# Altium PCB main1.PcbDoc
Units mm, origin at the board's own origin, x right, y up, seen from the top; angles counter-clockwise.
Board outline 100 x 68 mm, 2 copper layers (Top Layer, Bottom Layer); 32 components, 45 nets, 142 pads, 32 vias.
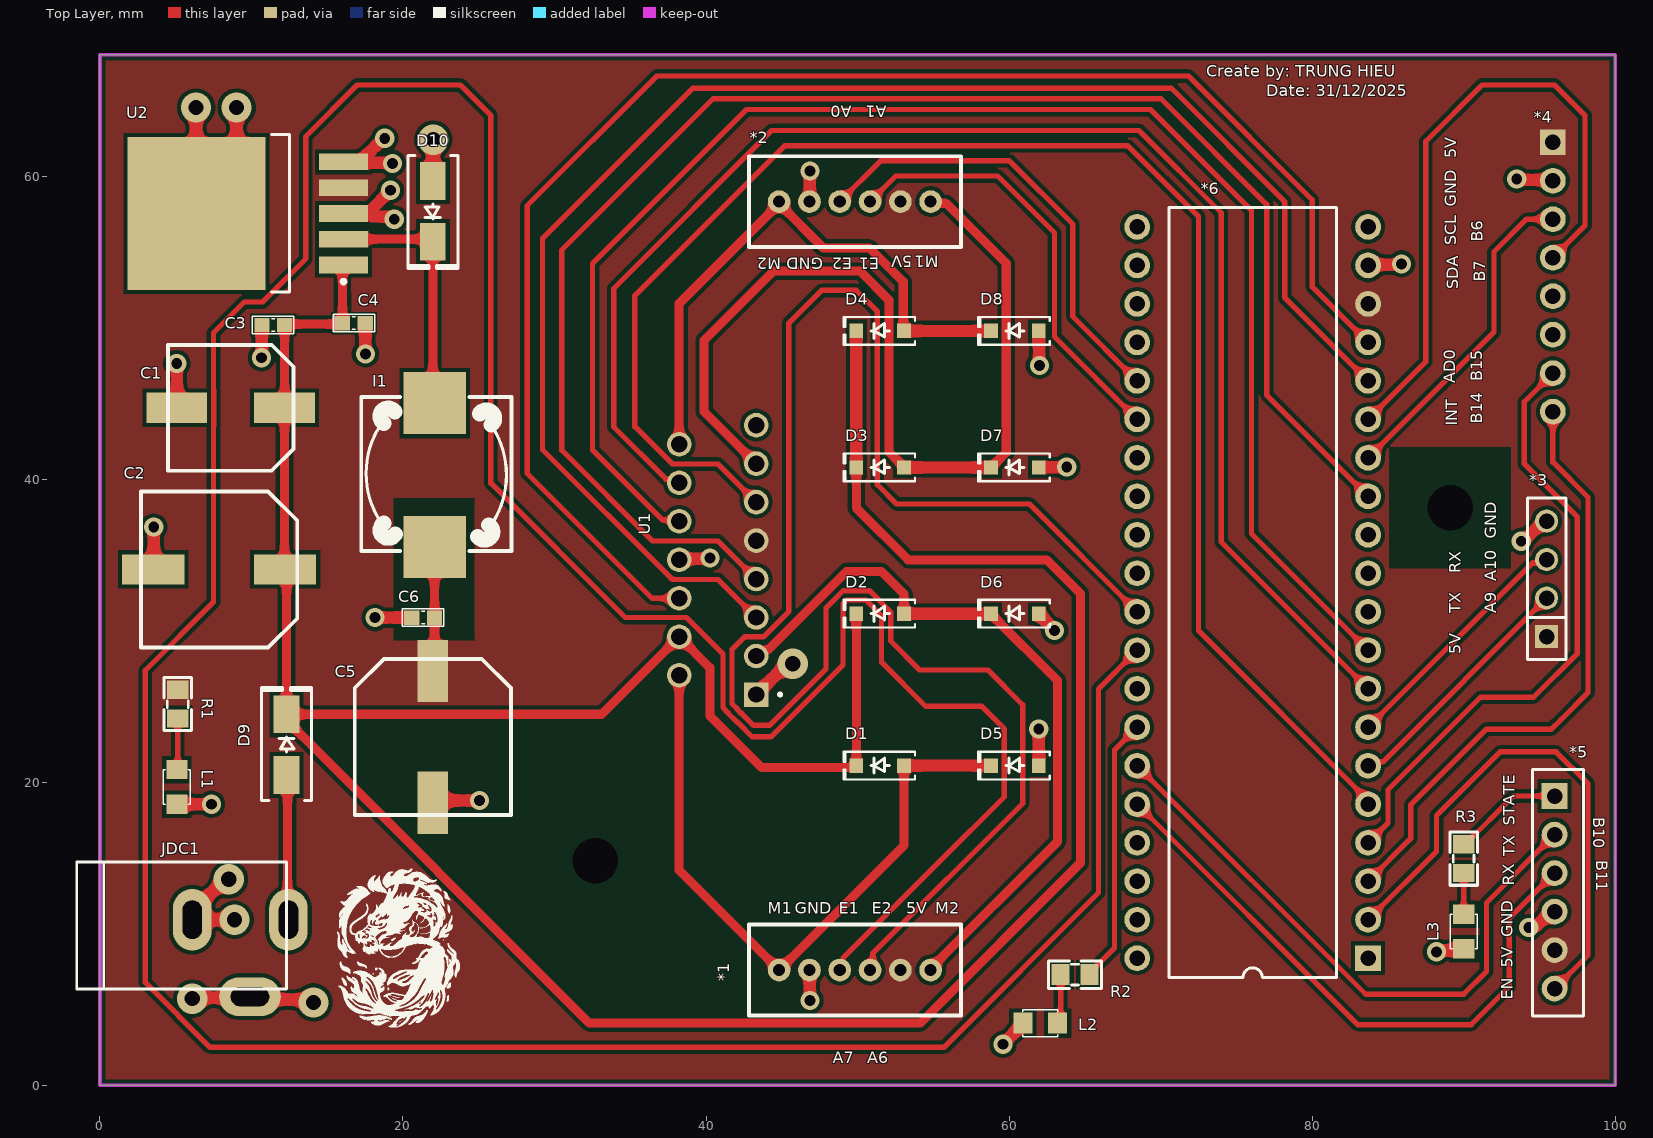
[diagram p0: Top Layer view]
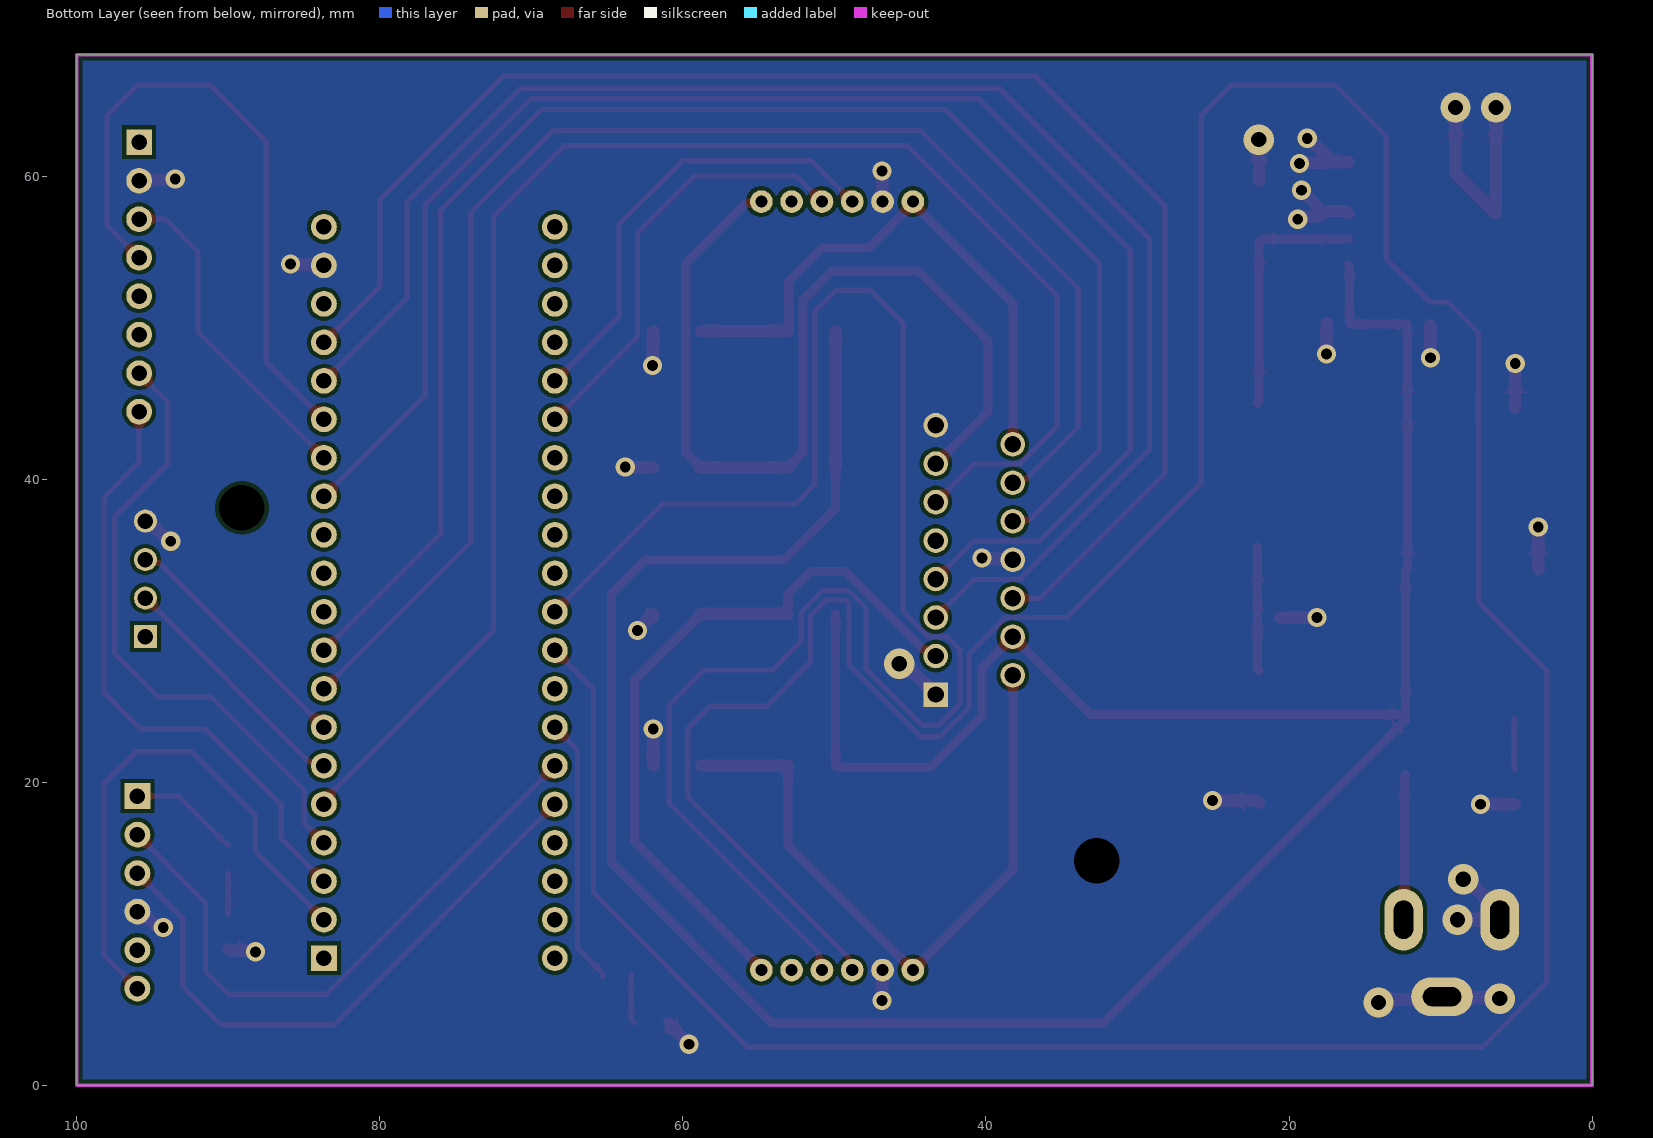
[diagram p1: Bottom Layer view, seen from below]
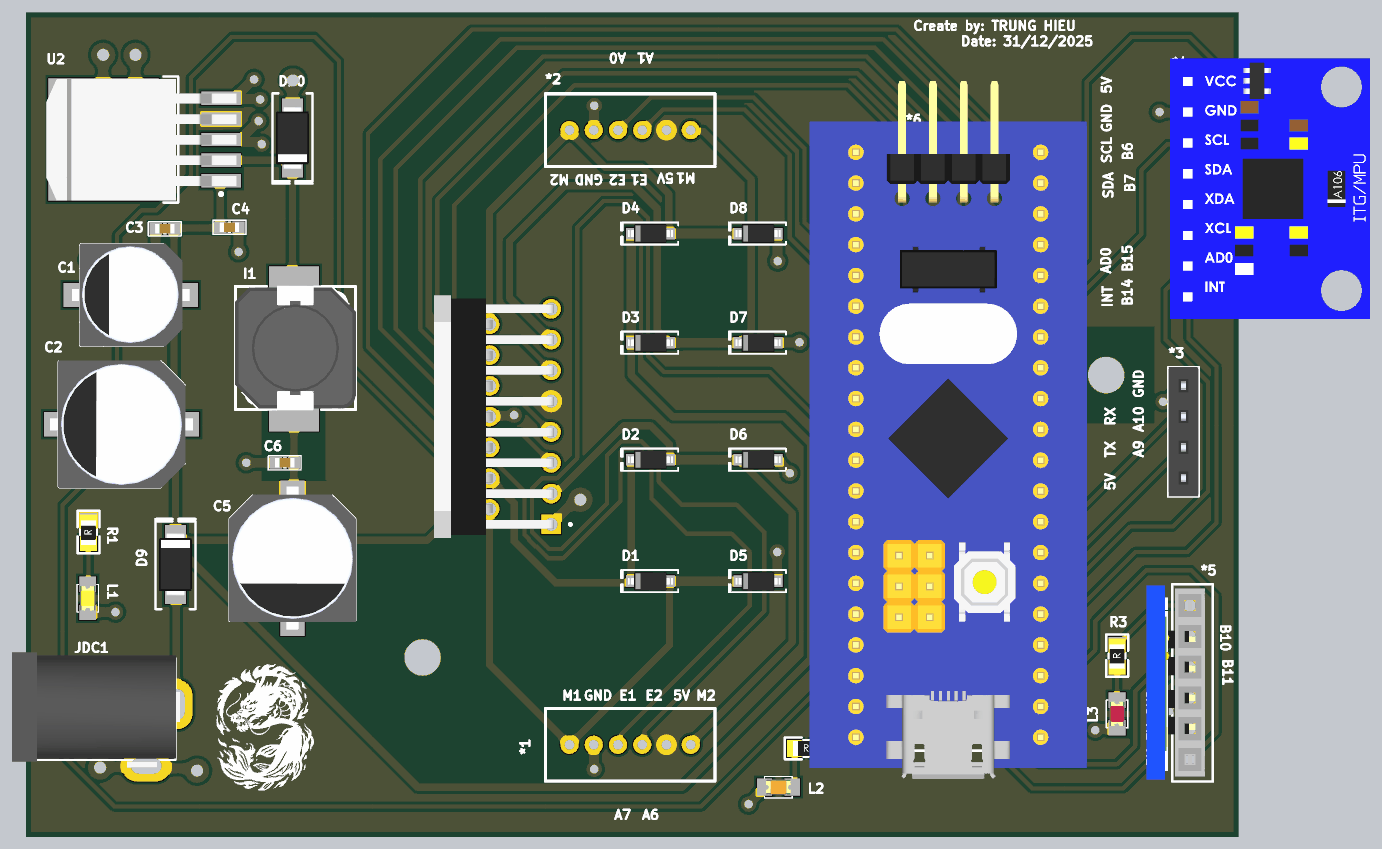
[diagram p2: 3D render of the assembled board from above, using the file's embedded part models]

## Layer stack, top to bottom
Top Solder: solder mask 0.0102, Solder Resist, Dk 3.5
Top Layer: signal copper 0.0356
Dielectric 1: dielectric 0.32, FR-4, Dk 4.8
Bottom Layer: signal copper 0.0356
Bottom Solder: solder mask 0.0102, Solder Resist, Dk 3.5

## Board outline
0,0 0,68 100,68 100,0

## Design rules (kind name [scope] priority, off if disabled: settings)
Clearance [All] p1: gap=0.254 ignorepadtopadclearanceinfootprint=FALSE
Height [All] p1: minheight=0 maxheight=254 prefheight=12.7
PlaneConnect [All] p1: planeconnectstyle=Direct reliefexpansion=0.508 reliefentries=4 reliefconductorwidth=0.254 reliefairgap=0.254
PolygonConnect [All] p1: connectstyle=Direct reliefconductorwidth=0.254 reliefentries=4 polygonreliefangle="90 Angle" airgapwidth=0.254
RoutingVias [All] p1: holewidth=0.4 width=0.8 viastyle="Through Hole" minholewidth=0.4 minwidth=0.8 maxholewidth=1 maxwidth=2
SilkToSolderMaskClearance [IsPad] p1: minsilkscreentomaskgap=0.025 clearancetoexposedcopper=TRUE
SolderMaskExpansion SolderMaskExpansion_1 [IsVia] p1: expansion=0.102 istentingtop=TRUE
SolderMaskExpansion [All] p2: expansion=0.102 istentingtop=FALSE
Width Width_Power [InNetClass('Power')] p1: maxlimit=0.8 minlimit=0.4 preferedwidth=0.6
Width Width_Signal [InNetClass('Signal')] p2: maxlimit=0.35 minlimit=0.35 preferedwidth=0.35
27 further rules are at their usual default settings.

## Classes and differential pairs
net class Signal: A0 A1 A2 A3 A4 A5 A6 A7 A8 A9 A10 A11 A12 A15 B0 B1 B3 B4 B5 B6 B7 B8 B9 B10 B11 B12 B13 B14 B15 C13 C14 C15 Net*5_1 NetL1_1 NetL2_1 NetL3_1
net class Power: +5 +12 GND NetD9_1 NetD10_2 OUT1 OUT2 OUT3 OUT4
component class U_stm32: *3 *4 *5 L3 R2 R3
component class U_LM2596: C2 C3 C4 C5 C6 D9 D10 I1 JDC1 L1 R1 U2
component class U_L298N: *1 *2 C1 D1 D2 D3 D4 D5 D6 D7 D8 U1

## Components (designator, comment, footprint, x,y, rotation, side; value= is the part's Value field where it differs from the comment)
*1 "PH2.0-6x1P" PH2.0-6P 44.826,7.597 r0 top
*2 "PH2.0-6x1P" PH2.0-6P 44.826,58.307 r0 top
*3 "jumper duc 1x4" "jumper cai 1x4" 95.218,33.004 r90 top
*4 "mpu 6050" "MPU 6050" 103.225,54.342 r270 top
*5 "hc05" HC05 95.44,12.15 r270 top
*6 "blue pill" "blue pill" 75.394,32.589 r180 top
C1 "220uF" "tu nhom 8 (f)" 8.636,44.704 r180 top
C2 "680uF/25V" "tu nhom 10 (G)" 7.874,34.036 r180 top
C3 "0.1uF" "tu 0603" 11.442,50.165 r180 top
C4 "1uF" "tu 0603" 16.764,50.292 r0 top
C5 "470uF" "tu nhom 10 (G)" 21.971,22.987 r270 top
C6 "0.1uF" "tu 0603" 21.336,30.861 r180 top
D1 "S4" "DIODE SOD-123" 51.493,21.09 r180 top
D2 "S4" "DIODE SOD-123" 51.493,31.115 r180 top
D3 "S4" "DIODE SOD-123" 51.493,40.767 r180 top
D4 "S4" "DIODE SOD-123" 51.493,49.776 r180 top
D5 "S4" "DIODE SOD-123" 60.383,21.09 r180 top
D6 "S4" "DIODE SOD-123" 60.383,31.115 r180 top
D7 "S4" "DIODE SOD-123" 60.383,40.767 r180 top
D8 "S4" "DIODE SOD-123" 60.383,49.776 r180 top
D9 "SS34" "DIODE SMA" 12.319,22.479 r90 top
D10 "SS34" "DIODE SMA" 21.971,57.658 r270 top
I1 "1040" 1040 22.098,40.259 r270 top
JDC1 "Jac DC" DC0 9.271,8.382 r0 top
L1 "LED 0805" LED-0805-Yellow 5.08,20.828 r270 top
L2 "LED 0805" LED-0805-Orange 63.2,4.1 r180 top
L3 "LED 0805" LED-0805-Red 90,11.286 r270 top
R1 "220" "tro smd 0805" 5.08,25.146 r90 top
R2 "220" "tro smd 0805" 64.346,7.361 r0 top
R3 "220" "tro smd 0805" 89.939,14.946 r90 top
U1 "L298N" L298N 43.307,25.781 r180 top
U2 "LM2596S-5.0" TO-263-5 9.779,57.531 r180 top

## Footprints (in the part's own frame and the unit in brackets; to place one, negate y for a bottom-side part, rotate by r counter-clockwise, add the part's x,y. Pads: shape width x height; smd on the part's side, far side on the other; paste and mask are expansions set on the pad)
1040 [mm]
  rect 4.1x4.1 smd: 1(-4.75,0) 2(4.75,0)
  silkscreen extent -5.15,-4.85 5.01,5.06, body extent -5.23,-4.89 5.09,5.11, height 3.78
"blue pill" [mm]
  rect 1.7x1.7 hole 1.02: 1(-8.299,24.207)
  round 1.7 hole 1.02: 2(-8.299,21.667) 3(-8.299,19.127) 4(-8.299,16.587) 5(-8.299,14.047) 6(-8.299,11.507) 7(-8.299,8.967) 8(-8.299,6.427) 9(-8.299,3.887) 10(-8.299,1.347) 11(-8.299,-1.193) 12(-8.299,-3.733) 13(-8.299,-6.273) 14(-8.299,-8.813) 15(-8.299,-11.353) 16(-8.299,-13.893) 17(-8.299,-16.433) 18(-8.299,-18.973) 19(-8.299,-21.513) 20(-8.299,-24.053) 21(6.941,-24.053) 22(6.941,-21.513) 23(6.941,-18.973) 24(6.941,-16.433) 25(6.941,-13.893) 26(6.941,-11.353) 27(6.941,-8.813) 28(6.941,-6.273) 29(6.941,-3.733) 30(6.941,-1.193) 31(6.941,1.347) 32(6.941,3.887) 33(6.941,6.427) 34(6.941,8.967) 35(6.941,11.507) 36(6.941,14.047) 37(6.941,16.587) 38(6.941,19.127) 39(6.941,21.667) 40(6.941,24.207)
  silkscreen extent -6.21,-25.32 4.86,25.48, body extent -12.11,-29.76 10.75,27.8, height 16.12
DC0 [mil] "Jac DC input"
  oval 100x160 hole 50 slot 100 at 90 deg: 1(125,100) 2(-125,100)
  oval 160x100 hole 50 slot 100 at 0 deg: 3(25,-100)
  silkscreen extent -425,-80 120,250, body extent -410,-105 134,269, height 434
"DIODE SMA" [mm] "SMA"
  rect 2.5x1.7 smd: 1(-2,0) 2(2,0)
  silkscreen extent -3.68,-1.65 3.75,1.65, body extent -2.6,-1.37 2.6,1.37, height 2.4
"DIODE SOD-123" [mm] "SOD-123"
  rect 0.9x0.95 smd: 1(-1.575,0) 2(1.575,0)
  silkscreen extent -2.3,-0.92 2.41,0.92, body extent -1.86,-0.78 1.86,0.77, height 1.35
HC05 [mm]
  rect 1.7x1.7 hole 1.02: 1(-6.93,0.56)
  round 1.7 hole 1.02: 2(-4.39,0.56) 3(-1.85,0.56) 4(0.69,0.56) 5(3.23,0.56) 6(5.77,0.56)
  silkscreen extent -8.69,-0.9 7.58,2.46, body extent -8.58,-3 7.42,1.82, height 38
"jumper cai 1x4" [mm]
  rect 1.52x1.52 hole 1.02: 1(-3.397,-0.254)
  round 1.52 hole 1.02: 2(-0.857,-0.254) 3(1.683,-0.254) 4(4.223,-0.254)
  silkscreen extent -4.92,-1.52 5.74,1.02, body extent -4.92,-1.5 5.74,1, height 8.51
L298N [mm]
  rect 1.62x1.62 hole 1.08: 1(0,0)
  round 1.62 hole 1.08: 2(5.08,-1.27) 3(0,-2.54) 4(5.08,-3.81) 5(0,-5.08) 6(5.08,-6.35) 7(0,-7.62) 8(5.08,-8.89) 9(0,-10.16) 10(5.08,-11.43) 11(0,-12.7) 12(5.08,-13.97) 13(0,-15.24) 14(5.08,-16.51) 15(0,-17.78)
  silkscreen extent -1.69,-0.1 -1.49,0.1, body extent -0.24,-18.89 9.65,1.11, height 23.85
LED-0805-Orange [mil]
  rect 50x55 smd: 1(0,0) 2(90,0)
  silkscreen extent 0,-35 90,35, body extent 5,-25 85,25, height 43
LED-0805-Red [mil]
  rect 50x55 smd: 1(0,0) 2(90,0)
  silkscreen extent 0,-35 90,35, body extent 5,-25 85,25, height 43
LED-0805-Yellow [mil]
  rect 50x55 smd: 1(0,0) 2(90,0)
  silkscreen extent 0,-35 90,35, body extent 5,-25 85,25, height 43
"MPU 6050" [mm]
  rect 1.7x1.7 hole 1.02: 0(-7.888,-7.34)
  round 1.7 hole 1.02: 1(-5.348,-7.34) 2(-2.808,-7.34) 3(-0.268,-7.34) 4(2.272,-7.34) 5(4.812,-7.34) 6(7.352,-7.34) 7(9.892,-7.34)
  body extent -9.87,-8.86 11.63,7.64, height 11.03
PH2.0-6P [mm]
  round 1.5 hole 0.8: 1(0,0) 2(2,0) 3(4,0) 4(6,0) 5(8,0) 6(10,0)
  silkscreen extent -2,-3 12,3
TO-263-5 [mm] "D2-PAK, 6-Pads, Body 8.9x10.4mm (max), IPC Medium Density"
  rect 3.25x1.1 smd: 1(-6.3,3.4) 2(-6.3,1.7) 3(-6.3,0) 4(-6.3,-1.7) 5(-6.3,-3.4)
  rect 9.1x10.1 smd: 6(3.4,0)
  silkscreen extent -6.43,-5.2 -1.55,5.2, body extent -7.56,-4.98 8.11,5.02, height 4.83
"tro smd 0805" [mm]
  rect 1.2x1.4 smd: 1(-0.946,-0.061) 2(0.954,-0.061)
  silkscreen extent -1.75,-0.97 1.75,0.84, body extent -1.56,-0.76 1.44,0.64, height 0.53
"tu 0603" [mm] "Chip Capacitor, 2-Leads, Body 1,60x0,80mm, IPC Medium Density"
  rect 1x0.95 smd mask+0.076: 1(-0.75,0) 2(0.75,0)
  silkscreen extent -1.35,-0.58 1.37,0.58, body extent -0.8,-0.4 0.8,0.4, height 0.9
"tu nhom 8 (f)" [mm]
  rect 4x2 smd: 1(-3.55,0) 2(3.55,0)
  silkscreen extent -4.15,-4.15 4.15,4.15, body extent -4.85,-4.25 4.85,4.25, height 10.5
"tu nhom 10 (G)" [mm]
  rect 4.1x2 smd: 1(-4.35,0) 2(4.35,0)
  silkscreen extent -5.15,-5.15 5.15,5.15, body extent -5.9,-5.25 5.9,5.25, height 10.5

## Part data
C1: library part "Tu Nhom 220uF 25V", "Dán", Chung_Loai=Dán, Don_Vi=Con, Ma_Hang=MH002221, So_Chan=2, Ten_Linh_Kien="Tụ Nhôm 220uF 25V"
C2: library part "Tu Nhom 680uF 16V", "Dán", Chung_Loai=Dán, Don_Vi=Con, Ma_Hang=MH007513, So_Chan=2, Ten_Linh_Kien="Tụ Nhôm 680uF 16V 10x10.5MM"
C3 C6: library part "Tu 0603 104 50V 10%", "Dán", Chung_Loai=Dán, Don_Vi=Con, Ma_Hang=MH004568, So_Chan=2, Ten_Linh_Kien="Tụ 0603 104-100nF 10% 50V"
C4: library part "Tu 0603 105 50V 10%", "Dán", Chung_Loai=Dán, Don_Vi=Con, Ma_Hang=MH004569, So_Chan=2, Ten_Linh_Kien="Tụ 0603 105-1uF 50V 10%"
C5: library part "Tu Nhom 470uF 35V", "Dán", Chung_Loai=Dán, Don_Vi=Con, Ma_Hang=MH004418, So_Chan=2, Ten_Linh_Kien="Tụ Nhôm 470uF 35V 10x10.5MM"
D1 D2 D3 D4 D5 D6 D7 D8: library part "Diode S4", "Dán", Chung_Loai=Dán, Don_Vi=Con, Ma_Hang=MH005519, Ten_Linh_Kien="Diode S4 SOD123 ( 1N5819 SOD123)"
D9 D10: library part "Diode SS34 ( 1N5822 )", "Dán", Chung_Loai=Dán, Don_Vi=Con, Ma_Hang=MH002104, Ten_Linh_Kien="Diode SS34 3A 40V SMA ( 1N5822 SS34A)"
I1: "Generic Encapsulated Inductor 1040."
JDC1: library part DCIN, "Jac DC input"
L1: library part "LED 0805 Trang", "Dán", Chung_Loai=Dán, Don_Vi=Con, Ma_Hang=MH002946, Ten_Linh_Kien="LED 0805 Màu Trắng ( White)"
L2: library part "LED 0805 Cam", "Dán", Chung_Loai=Dán, Don_Vi=Con, Ma_Hang=MH002328, Ten_Linh_Kien="LED 0805 Màu Cam ( Orange)"
L3: library part "LED 0805 Do", "Dán", Chung_Loai=Dán, Don_Vi=Con, Ma_Hang=MH000897, Ten_Linh_Kien="LED 0805 Màu Đỏ (Red)"
R1 R2 R3: library part "Tro 0805 1% 1k", "Dán", Chung_Loai=Dán, Don_Vi=Con, Ma_Hang=MH005468, So_Chan=2, Ten_Linh_Kien="Trở 0805 1% 1k"
U1: "Half Bridge _4_ Driver DC Motors, Relays, Solenoids, Stepper Motors Bipolar 15-Multiwatt", Package="Multiwatt-15 STMicroelectronics", Availability=Unavailable, MF=STMicroelectronics, MP=L298N, Price=None, SnapEDA_Link=https://www.snapeda.com/parts/L298N/STMicroelectronics/view-part/294022/?ref=snap
U2: "Simple Switcher 3A Step-Down Voltage Regulator"

## Free pads (board coordinates)
  round 0 hole 3: q(32.7,14.8) q(89.1,38.1)

## Via types
v1: diameter 1.27, hole 0.711, Top Layer to Bottom Layer, tented both sides, 24 vias
v2: diameter 2, hole 1, Top Layer to Bottom Layer, tented both sides, 8 vias

## Nets (pads, with @x,y where several pads share a name; then routed paths per layer and width w, separated by ;. In a path a pad name is that pad's centre, name@x,y a point inside that pad or via, vN(x,y) a via of type N, cw(c..) or ccw(c..) an arc to the next point about the centre after c; other vN are vias at no path point)
+5: *1.5 *2.5 *3.1 *4.0 *5.5 *6.18 C5.1 C6.1 I1.2 R1.2 U1.9 U2.4 | length 8.2
  Top Layer w0.6: C5.1 22.086,27.452 C6.1 22.086,35.497 I1.2
+12: C1.1 C2.1 C3.1 C4.1 D1.2 D2.2 D3.2 D4.2 D9.2 U1.4 U2.1 | length 200.8
  Top Layer w0.6: U2.1 16.002,54.054 16.002,52.324 16.014,52.312 C4.1 15.95,50.228 12.255,50.228 C3.1 12.192,44.71 C1.1 12.186,34.074 C2.1 12.319,33.941 D9.2 ; D2.2 49.918,21.065 49.868,21.015 49.484,21.015 49.424,20.955 43.688,20.955 40.259,24.384 40.259,27.559 U1.4 33.115,24.479 D9.2 ; D3.2 49.918,38.093 53.34,34.671 62.484,34.671 64.7,32.455 64.7,14.662 54.138,4.1 32.298,4.1 12.319,24.079 D9.2
  Top Layer w0.8: D3.2 D4.2
A0: *2.3 *6.25 | length 30.3
  Top Layer w0.35: *2.3 51.519,61 60.031,61 64.204,56.827 64.204,50.731 *6.25
A1: *2.4 *6.26 | length 29
  Top Layer w0.35: *2.4 52.519,60 59.253,60 63,56.253 63,49.395 *6.26
A2: *6.27
A3: *6.28
A4: *6.29
A5: *6.30
A6: *1.4 *6.31 | length 118.5
  Top Layer w0.35: *1.4 51.013,7.785 51.013,8.713 60.9,18.6 60.9,25.1 58.6,27.4 54.1,27.4 52.189,29.311 52.189,31.23 50.78,32.639 49.056,32.639 48.435,32.018 47.916,31.499 47.916,27.469 44.196,23.749 43.145,23.749 42.352,24.542 42.319,24.542 42.068,24.793 42.068,24.826 41.719,25.175 41.719,28.765 42.545,29.591 43.789,29.591 45.466,31.268 45.466,50.292 47.625,52.451 49.911,52.451 51.308,51.054 51.308,39.624 52.578,38.354 61.341,38.354 *6.31
A7: *1.3 *6.32 | length 260.4
  Top Layer w0.35: *1.3 49.046,7.817 49.046,8.395 55.383,14.732 59.687,19.036 59.687,23.513 58.2,25 54.502,25 51.585,27.917 51.585,30.98 50.546,32.019 49.29,32.019 49.039,31.768 49.039,27.738 44.288,22.987 43.053,22.987 42.102,23.938 42.069,23.938 41.464,24.543 41.464,24.576 41.115,24.925 41.115,28.455 38.709,30.861 34.671,30.861 25.8,39.732 25.8,63.989 23.789,66 16.978,66 13.589,62.611 13.589,54.534 11.358,52.303 10.744,51.689 9.525,51.689 7.493,49.657 7.493,45.904 7.515,45.882 7.515,43.526 7.493,43.504 7.493,31.877 3,27.384 3,6.779 7.279,2.5 55.7,2.5 65.9,12.7 65.9,26.149 *6.32
A8: *6.5 U1.11 | length 105.4
  Top Layer w0.35: U1.11 40.798,40.99 37.776,40.99 35.306,43.46 35.306,52.105 45.201,62 67.825,62 72.5,57.325 72.5,30 83.693,18.807 *6.5
A9: *3.2 *6.6 | length 16.4
  Top Layer w0.35: *6.6 83.951,21.34 84.665,21.34 *3.2
A10: *3.3 *6.7 | length 16.4
  Top Layer w0.35: *6.7 94.534,34.463 95.248,34.463 *3.3
A11: *6.8 U1.12 | length 97.1
  Top Layer w0.35: U1.12 37.984,39.994 37.349,39.994 33.909,43.434 33.909,52.578 44.331,63 68.572,63 74,57.572 74,35.855 *6.8
A12: *6.9 U1.10 | length 102.7
  Top Layer w0.35: U1.10 38.141,37.297 37.125,37.297 32.512,41.91 32.512,54.229 42.672,64.389 69.342,64.389 76,57.731 76,36.395 *6.9
A15: *6.10
B0: *6.33
B1: *6.34 R2.2 | length 17.7
  Top Layer w0.35: R2.2@65.3,7.2 R2.2 65.3,7.4 66.96,9.06 66.96,22.129 *6.34
B3: *6.11
B4: *6.12
B5: *6.13 U1.7 | length 105.1
  Top Layer w0.35: U1.7 40.798,35.91 36.48,35.91 30.48,41.91 30.48,55.118 40.462,65.1 70.028,65.1 77,58.128 77,45.555 *6.13
B6: *4.2 *6.14 | length 21.8
  Top Layer w0.35: *6.14 92,49.709 92,55 94.15,57.15 *4.2
B7: *4.3 *6.15 | length 43.1
  Top Layer w0.35: *6.15 87.5,47.749 87.5,62.295 91.205,66 96,66 98,64 98,56.725 *4.3
B8: *6.16 U1.5 | length 102.9
  Top Layer w0.35: U1.5 40.798,33.37 37.842,33.37 37.78,33.432 37.714,33.432 29.21,41.936 29.21,55.88 39.13,65.8 70.7,65.8 78.185,58.315 78.185,51.99 *6.16
B9: *6.17 U1.6 | length 100.8
  Top Layer w0.35: U1.6 36.449,32.131 28.194,40.386 28.194,58.039 36.755,66.6 71.83,66.6 80,58.43 80,52.715 *6.17
B10: *5.2 *6.35 | length 40.8
  Top Layer w0.35: *6.35 83.535,6 90,6 91.5,7.5 91.5,12.04 *5.2
B11: *5.3 *6.36 | length 40.3
  Top Layer w0.35: *6.36 68.458,18.542 83,4 90.5,4 93,6.5 93,11 *5.3
B12: *6.1
B13: *5.6 *6.2 | length 35.8
  Top Layer w0.35: *6.2 88.2,15.429 88.2,17.8 92.4,22 96.1,22 98.2,19.9 98.2,8.58 *5.6
B14: *4.7 *6.3 | length 40.5
  Top Layer w0.35: *6.3 86.5,16.269 86.5,18.5 91.5,23.5 95.795,23.5 96.44,24.145 98.2,25.905 98.2,38.8 95.885,41.115 *4.7
B15: *4.6 *6.4 | length 41
  Top Layer w0.35: *6.4 85,17.309 85,19.5 91.104,25.604 94.604,25.604 97.5,28.5 97.5,37.5 94,41 94,45.105 *4.6
C13: *6.22
C14: *6.23
C15: *6.24
GND: *1.2 *2.2 *3.4 *4.1 *5.4 *6.19 C1.2 C2.2 C3.2 C4.2 C5.2 C6.2 D5.1 D6.1 D7.1 D8.1 D10.1 JDC1.2 JDC1.3 L1.2 L2.2 L3.2 pad.q@32.7,14.8 U1.1 U1.8 U1.15 U2.3 U2.5 U2.6 | length 95.1
  Top Layer w0.8: C2.2 3.556,34.068 v1(3.556,36.83) ; L1.2 v1(7.366,18.542) ; v1(5.08,47.625) 5.08,44.71 C1.2 ; v2(6.096,5.715) 6.159,5.779 9.842,5.779 JDC1.3 10.096,5.651 13.906,5.651 v2(14.097,5.461) ; v2(6.35,64.516) 6.35,57.56 U2.6 9.017,60.169 v2(9.017,64.516) ; v2(8.509,13.589) 8.255,13.589 6.096,11.43 JDC1.2 v2(8.89,10.922) ; v1(10.668,48.006) 10.68,48.018 10.68,50.153 C3.2 ; U2.3 16.229,57.681 17.803,57.681 v1(19.177,59.055) ; U2.5@17.154,60.882 v1@19.255,60.882 ; C4.2 17.52,50.286 17.52,48.266 v1(17.526,48.26) ; 17.803,57.468 17.946,57.324 19.298,57.324 19.431,57.191 v1(19.431,57.15) ; v1(18.161,30.861) C6.2 ; v1(18.796,62.484) 18.707,62.484 17.154,60.931 U2.5 16.128,60.882 v1@19.255,60.882 ; v1(19.304,60.833) v1@19.255,60.882 ; C5.2 22.125,18.791 v1(25.052,18.791) ; D10.1 21.986,59.673 21.986,62.386 v2(22,62.4) ; U1.8 38.291,34.734 40.195,34.734 v1(40.259,34.798) ; U1.1 45.339,27.813 v2(45.72,27.813) ; *1.2 46.845,7.579 46.845,5.606 v1(46.863,5.588) ; *2.2 46.845,58.325 46.845,60.307 v1(46.863,60.325) ; v1(59.6,2.7) 59.6,2.722 60.914,4.036 L2.2 ; D5.1 61.961,21.093 61.961,23.497 v1(61.964,23.5) ; D6.1 61.958,31.09 63,30.048 v1(63,30) ; D7.1 61.975,40.783 63.783,40.783 v1(63.8,40.8) ; D8.1 61.979,49.755 61.979,47.521 v1(62,47.5) ; *6.19 83.742,54.151 85.851,54.151 v1(85.9,54.2) ; v1(88.2,8.8) 88.29,8.89 89.89,8.89 L3.2 ; v1(93.5,59.8) 93.555,59.745 95.83,59.745 *4.1 ; v1(93.8,35.9) 93.89,35.99 94.04,35.99 95.277,37.227 *3.4 ; v1(94.3,10.4) 94.39,10.49 94.786,10.49 95.756,11.46 *5.4
Net*5_1: *5.1 R3.2 | length 7.6
  Top Layer w0.35: R3.2 90.1,15.9 93.28,19.08 *5.1 *5.1@95.82,18.9
NetD9_1: D9.1 JDC1.1 | length 10
  Top Layer w0.6: D9.1 12.383,20.415 12.383,10.986 JDC1.1
  Top Layer w0.8: JDC1.1 12.446,11.176 JDC1.1@12.573,11.303
NetD10_2: D10.2 I1.1 U2.2 | length 16.7
  Top Layer w0.6: U2.2 21.798,55.831 D10.2 21.971,45.136 I1.1
NetL1_1: L1.1 R1.1 | length 3.4
  Top Layer w0.35: L1.1 5.141,20.889 R1.1
NetL2_1: L2.1 R2.1 | length 3.3
  Top Layer w0.35: L2.1 63.4,4.3 R2.1
NetL3_1: L3.1 R3.1 | length 2.7
  Top Layer w0.35: L3.1 R3.1
OUT1: *1.1 D1.1 D5.2 U1.2 | length 44.8
  Top Layer w0.6: U1.2 38.227,14.196 *1.1 53.068,15.839 D1.1
  Top Layer w0.8: D1.1 D5.2
OUT2: *1.6 D2.1 D6.2 U1.3 | length 48.7
  Top Layer w0.6: U1.3 43.529,28.321 43.97,28.762 44.133,28.762 49.28,33.909 51.562,33.909 53.068,32.403 D2.1@53.068,31.14 ; D2.1 D2.1@53.068,31.14 ; D2.1@53.17,31.242 D2.1@53.068,31.14 ; *1.6 54.826,7.709 63.2,16.083 63.2,26.698 58.808,31.09 D6.2
  Top Layer w0.8: D2.1 D6.2
OUT3: *2.6 D3.1 D7.2 U1.13 | length 62.3
  Top Layer w0.6: U1.13 39.878,44.45 39.878,49.149 44.45,53.721 50.165,53.721 52.07,51.816 52.07,50.486 52.064,50.48 52.064,41.796 52.918,40.942 52.918,40.917 D3.1 ; D3.1@53.068,40.792 D3.1@53.17,40.894 ; *2.6 54.936,58.197 55.849,58.197 59.812,54.234 59.812,41.771 58.983,40.942 58.958,40.942 58.808,40.792 D7.2
  Top Layer w0.8: D3.1 D7.2
OUT4: *2.1 D4.1 D8.2 U1.14 | length 38.2
  Top Layer w0.6: U1.14 38.227,51.588 44.826,58.187 *2.1 44.826,58.171 47.752,55.245 50.8,55.245 53.018,53.027 53.018,49.826 D4.1
  Top Layer w0.8: D4.1 D8.2
pads on no net: *4.4 *4.5 *6.20 *6.21 *6.37 *6.38 *6.39 *6.40

## Polygon pours and split planes (outlines as drawn)
GND on Bottom Layer "GND" (solid, remove dead copper, pour order 0): 0,68 0,0 100,0 100,68
GND on Bottom Layer "VCC" (solid, remove dead copper, pour order 3): 0,0 0,68 100,68 100,0
+5 on Top Layer "VCC" (solid, remove dead copper, pour order 5): 0,0 0,68 100,68 100,0

## Keep-outs
Keep-Out Layer:
  the board outline again, w0.254

## Other copper
Top Layer:
  pour cut-out: 85.1,34.1 93.1,34.1 93.1,42.1 85.1,42.1
  pour cut-out: 28.7,10.8 36.7,10.8 36.7,18.8 28.7,18.8
  pour cut-out: 19.4,38.75 19.4,29.35 24.8,29.35 24.7,29.45 24.7,38.75

## Silkscreen, mask and mechanical layers (free items; w line width, h text height)
Top Overlay:
  drawing of 21 lines, arcs and shapes, not listed
  text "Create by: TRUNG HIEU" at 73.025,66.548 h0.76
  text "Date: 31/12/2025" at 76.962,65.278 h0.76
  text "A0" at 49.63,64.646 h0.76 r180
  text "A1" at 51.916,64.646 h0.76 r180
  text "5V" at 89.515,61.168 h0.76 r90
  text "GND" at 89.515,57.974 h0.76 r90
  text "B6" at 91.246,55.654 h0.76 r90
  text "SCL" at 89.515,55.434 h0.76 r90
  text "5V" at 53.594,54.737 h0.76 r180
  text "M1" at 55.372,54.737 h0.76 r180
  text "M2" at 44.958,54.61 h0.76 r180
  text "GND" at 47.752,54.61 h0.76 r180
  text "E2" at 49.657,54.61 h0.76 r180
  text "E1" at 51.435,54.61 h0.76 r180
  text "B7" at 91.42,53.021 h0.76 r90
  text "SDA" at 89.642,52.513 h0.76 r90
  text "B15" at 91.22,46.455 h0.76 r90
  text "AD0" at 89.442,46.328 h0.76 r90
  text "B14" at 91.22,43.661 h0.76 r90
  text "INT" at 89.569,43.534 h0.76 r90
  text "GND" at 92.146,36.054 h0.76 r90
  text "RX" at 89.802,33.774 h0.76 r90
  text "A10" at 92.146,33.254 h0.76 r90
  text "A9" at 92.146,31.154 h0.76 r90
  text "TX" at 89.802,31.153 h0.76 r90
  text "5V" at 89.802,28.44 h0.76 r90
  text "B10" at 98.562,17.699 h0.76 r270
  text "STATE" at 93.358,17.134 h0.76 r90
  text "TX" at 93.358,15.102 h0.76 r90
  text "B11" at 98.754,14.846 h0.76 r270
  text "RX" at 93.346,13.154 h0.76 r90
  text "M1" at 44.069,11.303 h0.76
  text "GND" at 45.847,11.303 h0.76
  text "E1" at 48.768,11.303 h0.76
  text "E2" at 50.927,11.303 h0.76
  text "5V" at 53.213,11.303 h0.76
  text "M2" at 55.118,11.303 h0.76
  text "GND" at 93.246,9.754 h0.76 r90
  text "5V" at 93.246,7.754 h0.76 r90
  text "EN" at 93.246,5.654 h0.76 r90
  text "A7" at 48.354,1.454 h0.76
  text "A6" at 50.654,1.454 h0.76